# Altium PCB PCB1.PcbDoc
Units mil, origin at the board's own origin, x right, y up, seen from the top; angles counter-clockwise.
Board outline 6000 x 4000 mil, 2 copper layers (Top Layer, Bottom Layer); 22 components, 19 nets, 68 pads, 0 vias.
Unrouted connection lines stored in the file: 41.
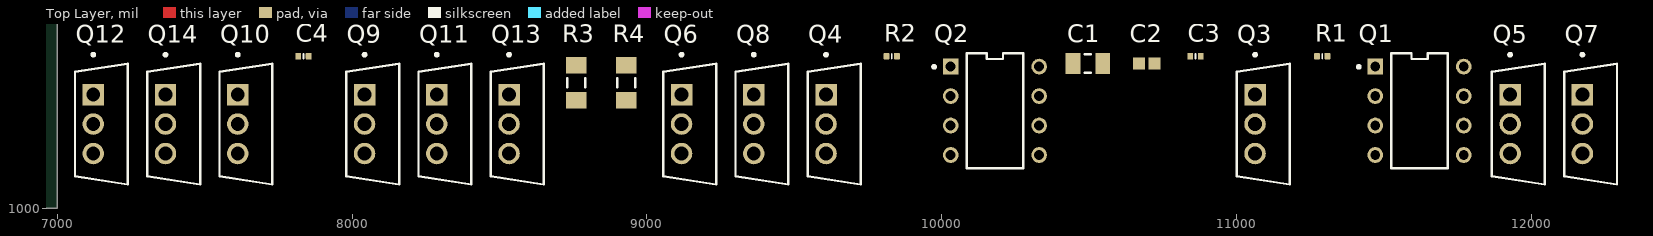
[diagram p0: Top Layer view]
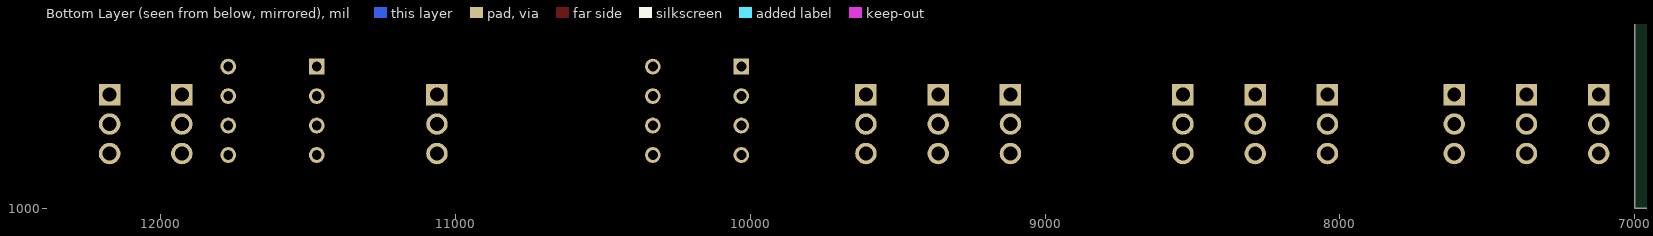
[diagram p1: Bottom Layer view, seen from below]

## Layer stack, top to bottom
Top Solder: solder mask 0.4, Solder Resist, Dk 3.5
Top Layer: signal copper 1.4
Dielectric 1: dielectric 12.6, FR-4, Dk 4.8
Bottom Layer: signal copper 1.4
Bottom Solder: solder mask 0.4, Solder Resist, Dk 3.5

## Board outline
1000,1000 7000,1000 7000,5000 1000,5000

## Design rules (kind name [scope] priority, off if disabled: settings)
Clearance [All] p1: gap=10 ignorepadtopadclearanceinfootprint=FALSE except(0: Arc-Hole Track-Hole SMDPad-Hole THPad-Hole Via-Hole Fill-Hole Poly-Hole Region-Hole Text-Hole)
PolygonConnect [All] p1: connectstyle=Relief reliefconductorwidth=10 reliefentries=4 polygonreliefangle="90 Angle" airgapwidth=10
RoutingVias [All] p1: holewidth=28 width=50 viastyle="Through Hole" minholewidth=28 minwidth=50 maxholewidth=28 maxwidth=50
SolderMaskExpansion [All] p1: expansion=4 istentingtop=FALSE
Width [All] p1: maxlimit=10 minlimit=10 preferedwidth=10
30 further rules are at their usual default settings.

## Components (designator, comment, footprint, x,y, rotation, side; value= is the part's Value field where it differs from the comment)
C1 "Capacitor 100 uF +/- 20% 6.3 V 1206" CAPC3216X190X55LL30T25 10495,1490 r0 top value=100µF
C2 "100pf" CAPC1608X90X40ML10T20 10695,1490 r0 top
C3 "Capacitor 100nF +/-20% 10V 0402" CAPC0402(1005)60_L 10860,1515 r0 top value=100nF
C4 "Capacitor 100nF +/-20% 10V 0402" CAPC0402(1005)60_L 7835,1515 r0 top value=100nF
Q1 "MCT6" FP-646CQ-MFG 11620,1330 r0 top
Q2 "MCT6" FP-646CQ-MFG 10180,1330 r0 top
Q3 "VN2222L" FP-PG-TO220-3-MFG 11090,1285 r0 top
Q4 "VN2222L" FP-PG-TO220-3-MFG 9635,1285 r0 top
Q5 "IRFZ44" FP-PG-TO220-3-MFG 11955,1285 r0 top
Q6 "IRFZ44" FP-PG-TO220-3-MFG 9145,1285 r0 top
Q7 "IRFZ44" FP-PG-TO220-3-MFG 12200,1285 r0 top
Q8 "IRFZ44" FP-PG-TO220-3-MFG 9390,1285 r0 top
Q9 "VN2222L" FP-PG-TO220-3-MFG 8070,1285 r0 top
Q10 "VN2222L" FP-PG-TO220-3-MFG 7640,1285 r0 top
Q11 "IRFZ44" FP-PG-TO220-3-MFG 8315,1285 r0 top
Q12 "IRFZ44" FP-PG-TO220-3-MFG 7150,1285 r0 top
Q13 "IRFZ44" FP-PG-TO220-3-MFG 8560,1285 r0 top
Q14 "IRFZ44" FP-PG-TO220-3-MFG 7395,1285 r0 top
R1 "Resistor 330R +/-5 % 0402 63 mW" RESC0402(1005)_L 11290,1515 r0 top value=330
R2 "Resistor 330R +/-5 % 0402 63 mW" RESC0402(1005)_L 9830,1515 r0 top value=330
R3 "Resistor 1k +/-1% 1206 250 mW" RESC3116X70X50ML13T20 8760,1425 r90 top value=1k
R4 "Resistor 1k +/-1% 1206 250 mW" RESC3116X70X50ML13T20 8930,1425 r90 top value=1k

## Footprints (in the part's own frame and the unit in brackets; to place one, negate y for a bottom-side part, rotate by r counter-clockwise, add the part's x,y. Pads: shape width x height; smd on the part's side, far side on the other; paste and mask are expansions set on the pad)
CAPC0402(1005)60_L [mm] "Chip Capacitor, Body 1.0x0.5mm, Height 0.6mm, IPC High Density"
  rrect25% 0.5x0.55 smd: 1(-0.45,0) 2(0.45,0)
  silkscreen extent 0,-0.2 0,0.2, body extent -0.5,-0.25 0.5,0.25, height 0.6
CAPC1608X90X40ML10T20 [mm] "Chip Capacitor, 2-Leads, Body 1.7x0.9mm, IPC Low Density"
  rect 1.05x1.05 smd: 1(-0.675,0) 2(0.675,0)
  body extent -0.85,-0.45 0.85,0.45, height 0.9
CAPC3216X190X55LL30T25 [mm] "Chip Capacitor, 2-Leads, Body 3.5x1.9mm, IPC High Density"
  rect 1.25x1.8 smd: 1(-1.275,0) 2(1.275,0)
  silkscreen extent -0.25,-0.8 0.25,0.8, body extent -1.75,-0.95 1.75,0.95, height 1.9
FP-646CQ-MFG [mm]
  rect 1.35x1.35 hole 0.85 paste-1000 mask+0: 1(-3.81,3.81)
  round 1.35 hole 0.85 paste-1000 mask+0: 2(-3.81,1.27) 3(-3.81,-1.27) 4(-3.81,-3.81) 5(3.81,-3.81) 6(3.81,-1.27) 7(3.81,1.27) 8(3.81,3.81)
  silkscreen extent -5.36,-4.95 2.43,4.95, body extent -4.58,-5.05 4.58,5.05, height 0.25
FP-PG-TO220-3-MFG [mm]
  rect 1.85x1.85 hole 1.2 paste-1000 mask+0: 1(-0.705,2.54)
  round 1.85 hole 1.2 paste-1000 mask+0: 2(-0.705,0) 3(-0.705,-2.54)
  silkscreen extent -2.27,-5.2 2.27,6.1, body extent -2.37,-5.55 2.37,5.55, height 0.25
RESC0402(1005)_L [mm] "Chip Resistor, Body 1.0x0.5mm, IPC High Density"
  rrect25% 0.5x0.55 smd: 1(-0.45,0) 2(0.45,0)
  silkscreen extent 0,-0.2 0,0.2, body extent -0.5,-0.25 0.5,0.25, height 0.3
RESC3116X70X50ML13T20 [mm] "Chip Resistor, 2-Leads, Body 3.25x1.65mm, IPC Low Density"
  rect 1.4x1.75 smd: 1(-1.5,0) 2(1.5,0)
  silkscreen extent -0.4,-0.77 0.4,0.77, body extent -1.63,-0.82 1.63,0.82, height 0.7

## Part data
C1: library part CMP-001-00019-6, "Chip Capacitor, 100 uF, +/- 20%, 6.3 V, 1206 (3216 Metric)", Capacitor Type=Ceramic, Case/Package=1206, Max Operating Temperature=85°C, Min Operating Temperature=-55°C, Tolerance=20%, Voltage Rating=6.3V, Mounting Technology=SM, Pins=2, RoHS Compliant=True
C2: library part CMP-2100-03594-1, "Chip Capacitor, 100 pF, +/- 5%, 50 V, -55 to 125 degC, 0603 (1608 Metric), RoHS, Tape and Reel", Capacitance=100pF, Case Code (Imperial)=0603, Case Code (Metric)=1608, Dielectric=C0G, Insulation Resistance=100GR, Manufacturer=Yageo, Max Operating Temperature=125degC, Min Operating Temperature=-55degC, Package Description="2-Pin Surface Mount Device, Body 1.6 x 0.8 mm", Package Quantity=1, Temperature Coefficient=30ppm/degC, Tolerance=5%, Voltage=50V, Case/Package=0603, Composition=Ceramic, Datasheet URL=http://www.yageo.com/documents/recent/UPY-GP_NP0_16V-to-50V_14.pdf, Datasheet Version="Rev. 14, 07/2016", Depth=0.8mm, Height=0.8mm, Lead Free=LeadFree, Length=1.6mm, Manufacturer URL=http://www.yageo.com/, Mount=SurfaceMount, Number of Pins=2, Package Reference=0603, Packaging=TapeandReel, Radiation Hardening=No, REACH SVHC=Unknown, RoHSCompliant=True, Termination=SMD/SMT, Thickness=0.035inch, Voltage Rating=50V, Voltage Rating (DC)=50V, Width=0.8mm
C3 C4: library part CMP-001-00061-3, "Chip Capacitor, 100nF +/-20%, 10V, 0402, Thickness 0.6 mm", Case/Package=0402, Max Operating Temperature=85°C, Min Operating Temperature=-55°C, Tolerance=20%, Voltage Rating=10V, Mounting Technology=SMT, Pins=2
Q1 Q2: library part CMP-00278-84329801-1, "MCT6 Optocoupler DC-IN 2-CH Transistor DC-OUT 8-Pin PDIP Black Bulk - Rail/Tube", Case/Package=PDIP, Collector Emitter Saturation Voltage=400mV, Current Transfer Ratio=50%, Forward Current=60mA, Forward Voltage=1.5V, Input Current=20mA, Isolation Voltage=5kV, Manufacturer Lifecycle Status=ACTIVE, Max Collector Current=30mA, Max Operating Temperature=100°C, Max Output Voltage=30V, Max Power Dissipation=400mW, Min Operating Temperature=-55°C, Reverse Breakdown Voltage=25V, Collector Emitter Voltage (VCEO)=400mV, Contact Plating=Tin, Height=4mm, Lead Free="Lead Free", Length=10.18mm, Lifecycle Status=Production, Max Input Current=60mA, Mount="Through Hole", NexarPartId=84329801, Number of Channels=2, Number of Circuits=2, Number of Elements=2, Number of Pins=8, Output Current per Channel=30mA, Output Voltage=30V, Packaging=Bulk, Power Dissipation=400mW, Radiation Hardening=No, REACH SVHC="No SVHC", Rise Time=2.4µs, RoHS=Compliant, Schedule B="8541408000, 8541408000", Weight=774mg, Width=7mm
Q3 Q4 Q5 Q6 Q7 Q8 Q9 Q10 Q11 Q12 Q13 Q14: library part CMP-32901-001154-1, "MOSFET N-CH 60V 55A TO220AB", Case/Package=TO-220, Continuous Drain Current (ID)=55A, Drain to Source Breakdown Voltage=60V, Drain to Source Resistance=16.5mR, Gate to Source Voltage (Vgs)=20V, Input Capacitance=1.812nF, Max Operating Temperature=175°C, Max Power Dissipation=115W, Min Operating Temperature=-55°C, Threshold Voltage=4V, Drain to Source Voltage (Vdss)=60V, Element Configuration=Single, Halogen Free="Halogen Free", Height=0.65inch, Lead Free="Lead Free", Length=0.42inch, Max Dual Supply Voltage=60V, Mount="Through Hole", Number of Pins=3, Packaging=Rail/Tube, Polarization=N, Power Dissipation=115W, Rds On Max=16.5mR, Reach SVHC Compliant=Yes, RoHS Compliant=Yes, Series=HEXFET®, Turn-Off Delay Time=40ns, Turn-On Delay Time=13ns, Width=0.19inch
R1 R2: library part CMP-009-00132-3, "Chip Resistor, 330 Ohms, +/-5 %, 63 mW, -55 to 155 degC, 0402", Case/Package=0402, Max Operating Temperature=155°C, Min Operating Temperature=-55°C, Power=63mW, Tolerance=5%, Pins=2
R3 R4: library part CMP-009-00011-5, "Chip Resistor, 1 KOhm, +/- 1%, 0.25 W, -55 to 155 degC, 1206 (3216 Metric)", Case/Package=1206, Max Operating Temperature=155°C, Min Operating Temperature=-55°C, Power=250mW, Tolerance=1%, Voltage Rating=200V, Mounting Technology=SM, Pins=2, RoHS Compliant=True

## Nets (pads, with @x,y where several pads share a name; then routed paths per layer and width w, separated by ;. In a path a pad name is that pad's centre, name@x,y a point inside that pad or via, vN(x,y) a via of type N, cw(c..) or ccw(c..) an arc to the next point about the centre after c; other vN are vias at no path point)
GND: C1.1 C2.1 Q3.3 Q4.3 Q6.3 Q8.3 Q9.3 Q10.3 Q12.3 Q14.3 R3.1 R4.1
NetC1_2: C1.2 C2.2 Q1.8 Q2.8 Q5.2 Q7.2 Q11.2 Q13.2
NetC3_1: C3.1 Q7.3 Q8.2
NetC3_2: C3.2 Q5.3 Q6.2
NetC4_1: C4.1 Q13.3 Q14.2
NetC4_2: C4.2 Q11.3 Q12.2
NetHDR1_1: R2.1
NetHDR1_2: R1.1
NetQ1_1: Q1.1 R1.2
NetQ1_7: Q1.7 R4.2
NetQ2_1: Q2.1 R2.2
NetQ2_7: Q2.7 R3.2
NetQ3_1: Q3.1 Q4.2 Q6.1 Q7.1
NetQ3_2: Q3.2 Q4.1 Q5.1 Q8.1
NetQ9_1: Q9.1
NetQ9_2: Q9.2 Q11.1 Q14.1
NetQ10_1: Q10.1
NetQ10_2: Q10.2 Q12.1 Q13.1
"Signal GND": Q1.2 Q2.2
pads on no net: Q1.3 Q1.4 Q1.5 Q1.6 Q2.3 Q2.4 Q2.5 Q2.6